# EAGLE board Active noise cancellation (EAGLE 9.6.2)
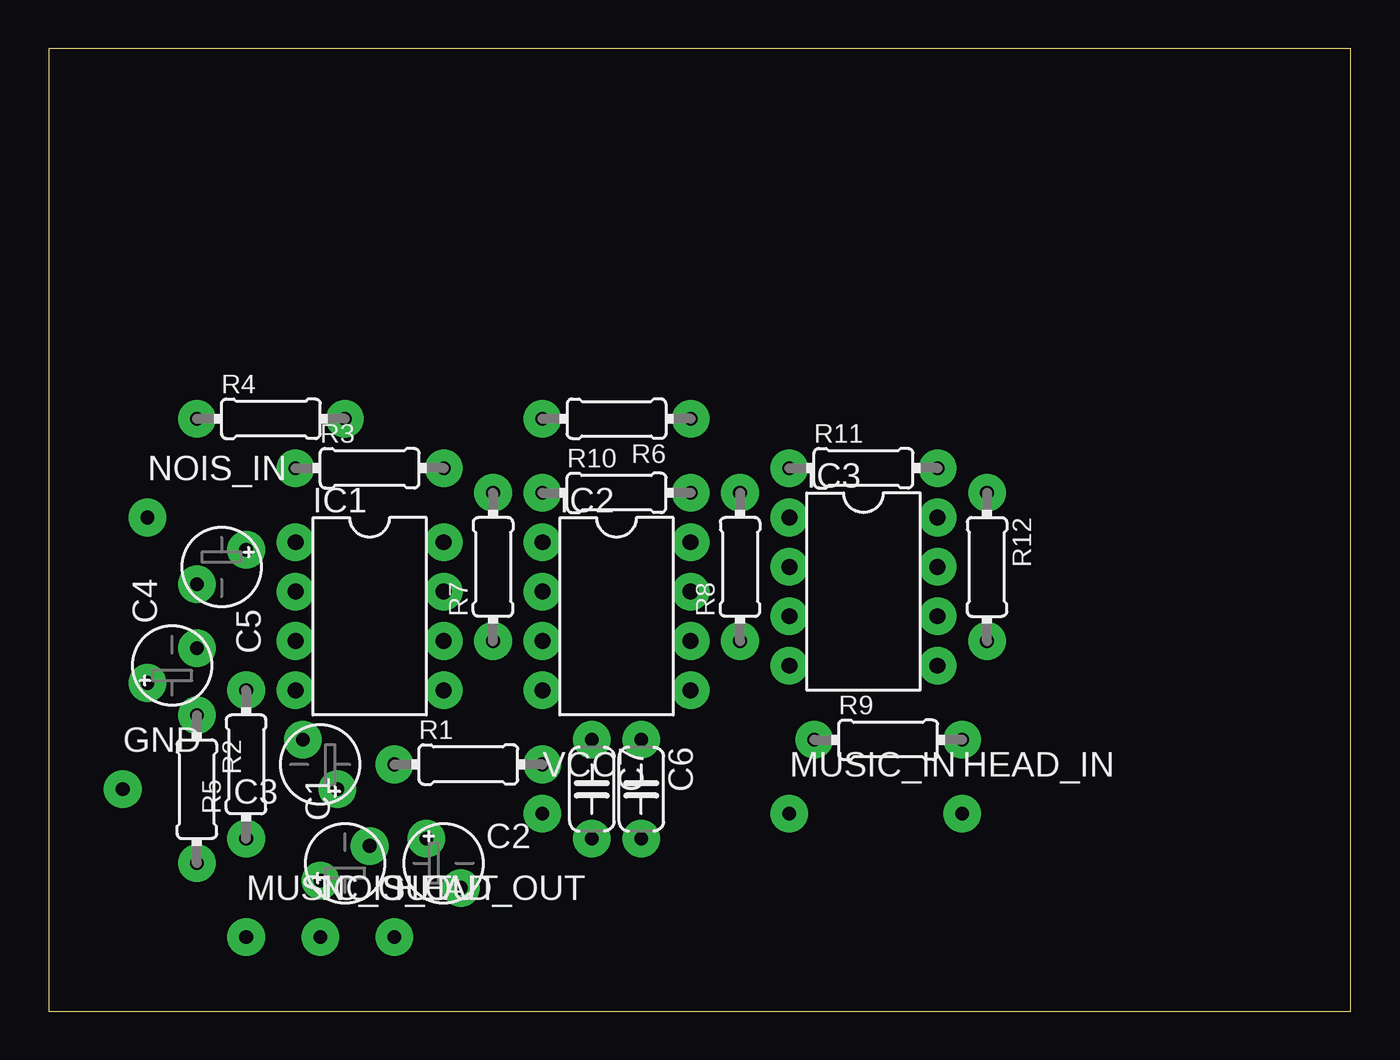
[diagram p0: board, top side]
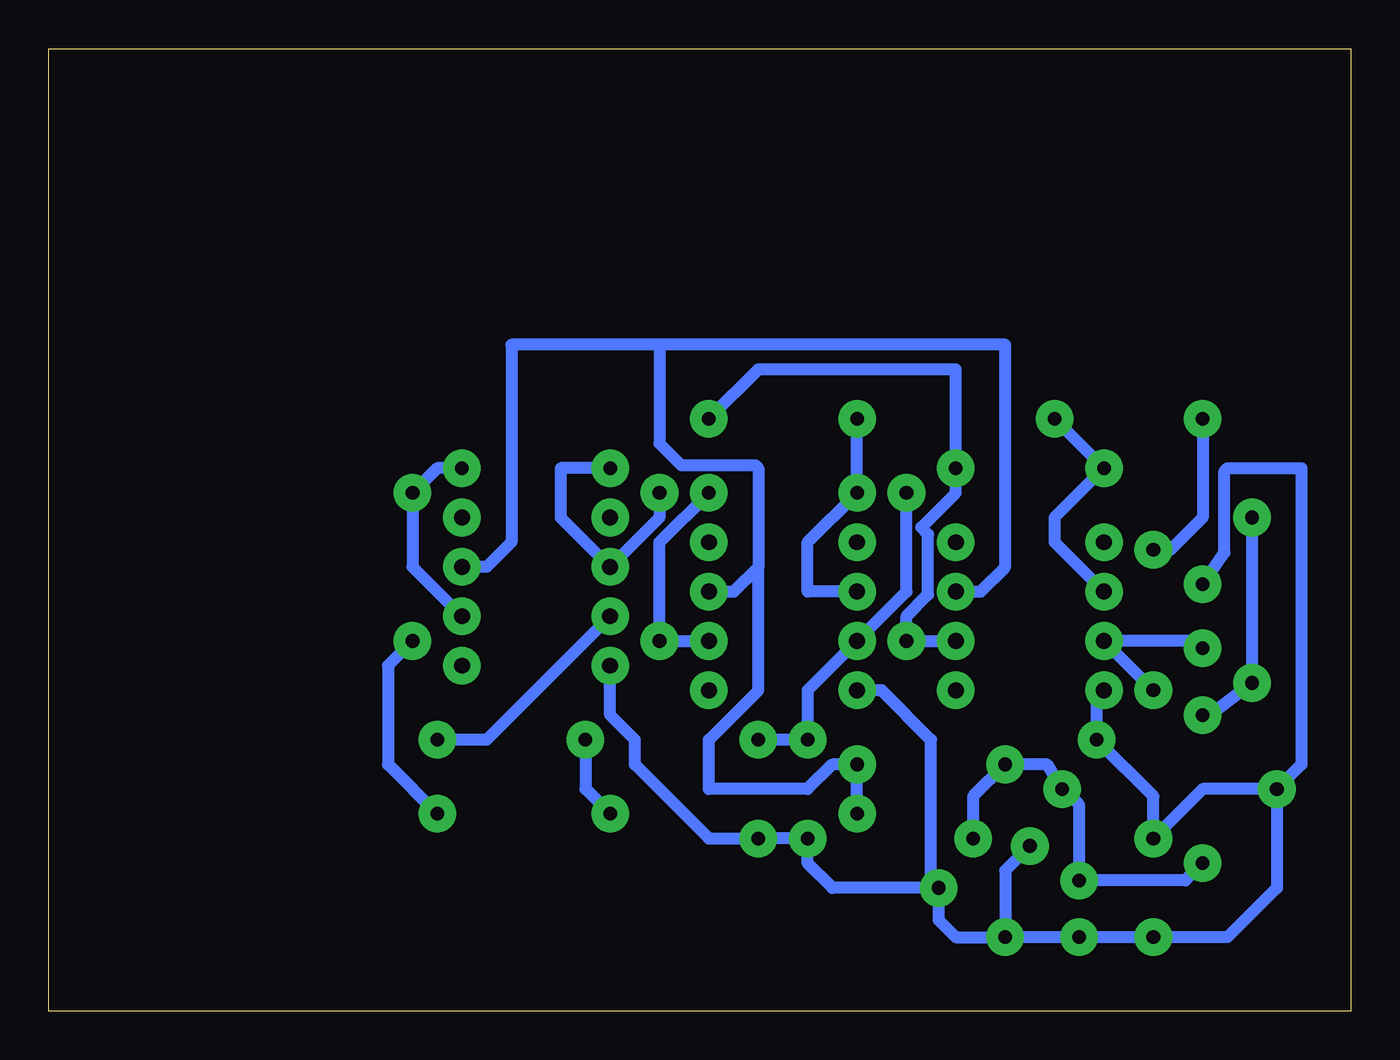
[diagram p1: board, bottom side, seen from below]

Size 66.98 x 49.52 mm. Coordinates in mm from the lower left corner, seen from the top.
Outline: 0,0 66.98,0 66.98,49.52 0,49.52 0,0
Copper layers (1*16): Top 0.035mm / dielectric 1.5mm / Bottom 0.035mm
Design rules "default": minimum track width 6mil, minimum drill 0.35mm, track to track 6mil, track to pad 6mil, pad to pad 6mil, via to via 6mil, smd to smd 6mil, copper to edge 40mil, drill to drill 6mil, minimum pad ring 10mil, minimum via ring 8mil, stop-mask expansion 4mil, vias tented up to drill 0mil, thermal gap 10mil

## Footprints (pad centres in the part's own frame; a part is rotated, then mirrored left to right if it is on the bottom)
E1,8-4 = drill 0.7 pad 1.93: + -0.889,1.27; - 0.889,-1.27
C050-024X044 = drill 0.7 pad 1.93: 1 -2.54,0; 2 2.54,0
PAD_0.1000 = drill 0.7 pad 1.93: 1 0,0
DIL08 = drill 0.813 pad 1.93: 1 -3.81,-3.81; 2 -1.27,-3.81; 3 1.27,-3.81; 4 3.81,-3.81; 5 3.81,3.81; 6 1.27,3.81; 7 -1.27,3.81; 8 -3.81,3.81
0204/7 = drill 0.7 pad 1.93: 1 -3.81,0; 2 3.81,0

## Placement (x,y rotation side)
C1  [E1,8-4]  15.24,7.62 90 top
C2  [E1,8-4]  20.32,7.62 0 top
C3  [E1,8-4]  13.97,12.7 180 top
C4  [E1,8-4]  6.35,17.78 90 top
C5  [E1,8-4]  8.89,22.86 270 top
C6  [C050-024X044]  30.48,11.43 270 top
C7  [C050-024X044]  27.94,11.43 270 top
GND  SPECIAL_DRILL_0.1000  [PAD_0.1000]  3.81,11.43 0 top
HEAD_IN  SPECIAL_DRILL_0.1000  [PAD_0.1000]  46.99,10.16 0 top
HEAD_OUT  SPECIAL_DRILL_0.1000  [PAD_0.1000]  17.78,3.81 0 top
IC1  LM741P  [DIL08]  16.51,20.32 270 top
IC2  LM741P  [DIL08]  29.21,20.32 270 top
IC3  LM741P  [DIL08]  41.91,21.59 270 top
MUSIC_IN  SPECIAL_DRILL_0.1000  [PAD_0.1000]  38.1,10.16 0 top
MUSIC_OUT  SPECIAL_DRILL_0.1000  [PAD_0.1000]  10.16,3.81 0 top
NOIS_IN  SPECIAL_DRILL_0.1000  [PAD_0.1000]  5.08,25.4 0 top
NOIS_OUT  SPECIAL_DRILL_0.1000  [PAD_0.1000]  13.97,3.81 0 top
R1  [0204/7]  21.59,12.7 0 top
R2  [0204/7]  7.62,11.43 270 top
R3  [0204/7]  16.51,27.94 0 top
R4  [0204/7]  11.43,30.48 0 top
R5  [0204/7]  10.16,12.7 90 top
R6  [0204/7]  29.21,30.48 180 top
R7  [0204/7]  22.86,22.86 90 top
R8  [0204/7]  35.56,22.86 90 top
R9  [0204/7]  43.18,13.97 0 top
R10  [0204/7]  29.21,26.67 0 top
R11  [0204/7]  41.91,27.94 0 top
R12  [0204/7]  48.26,22.86 270 top
VCC  SPECIAL_DRILL_0.1000  [PAD_0.1000]  25.4,10.16 0 top

## Library data of the parts
C1-C7 = rcl; SPICEPREFIX: C
GND HEAD_IN HEAD_OUT MUSIC_IN MUSIC_OUT NOIS_IN NOIS_OUT VCC = special-drill
IC1-IC3 = linear
R1-R12 = rcl; SPICEPREFIX: R

## Nets
GND: C1.- C2.- C3.- C5.- C6.2 C7.2 GND.1 HEAD_OUT.1 IC1.4 IC2.4 IC3.4 MUSIC_OUT.1 NOIS_OUT.1 R5.1
N$1: C1.+ C2.+ C3.+ R1.1 R2.2
N$2: IC2.6 R8.1 R10.2
N$3: C4.+ NOIS_IN.1 R2.1
N$4: C4.- IC1.3 R5.2
N$5: IC1.2 R3.1 R4.2
N$6: C5.+ R4.1
N$7: IC1.6 R3.2 R6.1 R7.1
N$8: IC3.2 R8.2 R11.1
N$9: IC2.2 R6.2 R10.1
N$10: C6.1 C7.1 IC2.3 R7.2
N$11: IC3.6 R11.2 R12.1
N$12: MUSIC_IN.1 R9.1
N$13: HEAD_IN.1 R12.2
N$14: IC3.3 R9.2
VCC: IC1.7 IC2.7 IC3.7 R1.2 VCC.1

## Tracks (layer width: path | path; a pad name or v marks a point on that pad's centre or on a via)
GND
  Bottom 0.61: GND.1 7.62,11.43 R5.1 10.16,11.05 C3.- 13.08,16.13 IC1.4 | GND.1 3.81,6.35 6.35,3.81 MUSIC_OUT.1 NOIS_OUT.1 HEAD_OUT.1 | IC3.4 38.1,15.24 36.83,13.97 36.83,12.7 33.02,8.89 C6.2 C7.2 27.94,7.62 26.67,6.35 C2.- | GND.1 2.54,12.7 2.54,27.94 6.35,27.94 6.5,27.79 6.5,23.6 C5.- | C1.- 17.78,7.24 HEAD_OUT.1 | C2.- 21.21,4.7 20.32,3.81 HEAD_OUT.1 | C2.- 21.59,6.73 21.59,13.97 24.13,16.51 IC2.4
N$1
  Bottom 0.61: C2.+ 19.43,11.05 R1.1 15.62,12.7 14.96,11.6 | C3.+ 14.96,11.6 | R2.2 8.51,6.73 C1.+ 13.97,10.61 14.96,11.6
N$2
  Bottom 0.61: IC2.6 R8.1 35.56,24.13 R10.2
N$3
  Bottom 0.61: 5.46,17.4 C4.+ | C4.+ NOIS_IN.1 | C4.+ 7.24,15.24 R2.1
N$4
  Bottom 0.61: C4.- 8,19.05 IC1.3 R5.2
N$5
  Bottom 0.61: IC1.2 15.24,24.13 15.24,25.4 R3.1 R4.2
N$6
  Bottom 0.61: R4.1 7.62,25.4 9.27,23.75 C5.+
N$7
  Bottom 0.61: R6.1 30.48,33.02 20.32,33.02 R3.2 20.32,26.67 22.1,24.89 21.74,24.54 21.74,21.44 22.86,20.32 R7.1 IC1.6
N$8
  Bottom 0.61: R11.1 40.64,27.94 40.64,25.4 IC3.2 35.56,25.4 R8.2
N$9
  Bottom 0.61: IC2.2 27.94,21.59 27.94,24.13 R10.1 R6.2
N$10
  Bottom 0.61: C6.1 C7.1 27.94,16.51 IC2.3 22.86,21.59 R7.2
N$11
  Bottom 0.61: IC3.6 48.26,22.86 R12.1 46.99,27.94 R11.2
N$12
  Bottom 0.61: R9.1 39.37,11.43 MUSIC_IN.1
N$13
  Bottom 0.61: R12.2 49.53,17.78 49.53,12.7 HEAD_IN.1
N$14
  Bottom 0.61: IC3.3 44.45,13.97 R9.2
VCC
  Bottom 0.61: IC1.7 19.05,21.59 17.78,22.86 17.78,34.29 35.56,34.29 | 35.56,34.29 43.18,34.29 43.18,24.13 44.45,22.86 IC3.7 | IC2.7 31.75,21.59 30.48,22.86 | 35.56,34.29 35.56,29.21 34.44,28.09 30.63,28.09 30.48,27.94 30.48,22.86 | VCC.1 R1.2 26.67,12.7 27.94,11.43 33.02,11.43 33.02,13.97 30.48,16.51 30.48,22.86